# Altium PCB 智能家居-窗帘-控制板.PcbDoc
Units mm, origin at the board's own origin, x right, y up, seen from the top; angles counter-clockwise.
Board outline 68.87 x 67.29 mm, 2 copper layers (Top Layer, Bottom Layer); 36 components, 30 nets, 155 pads, 0 vias.
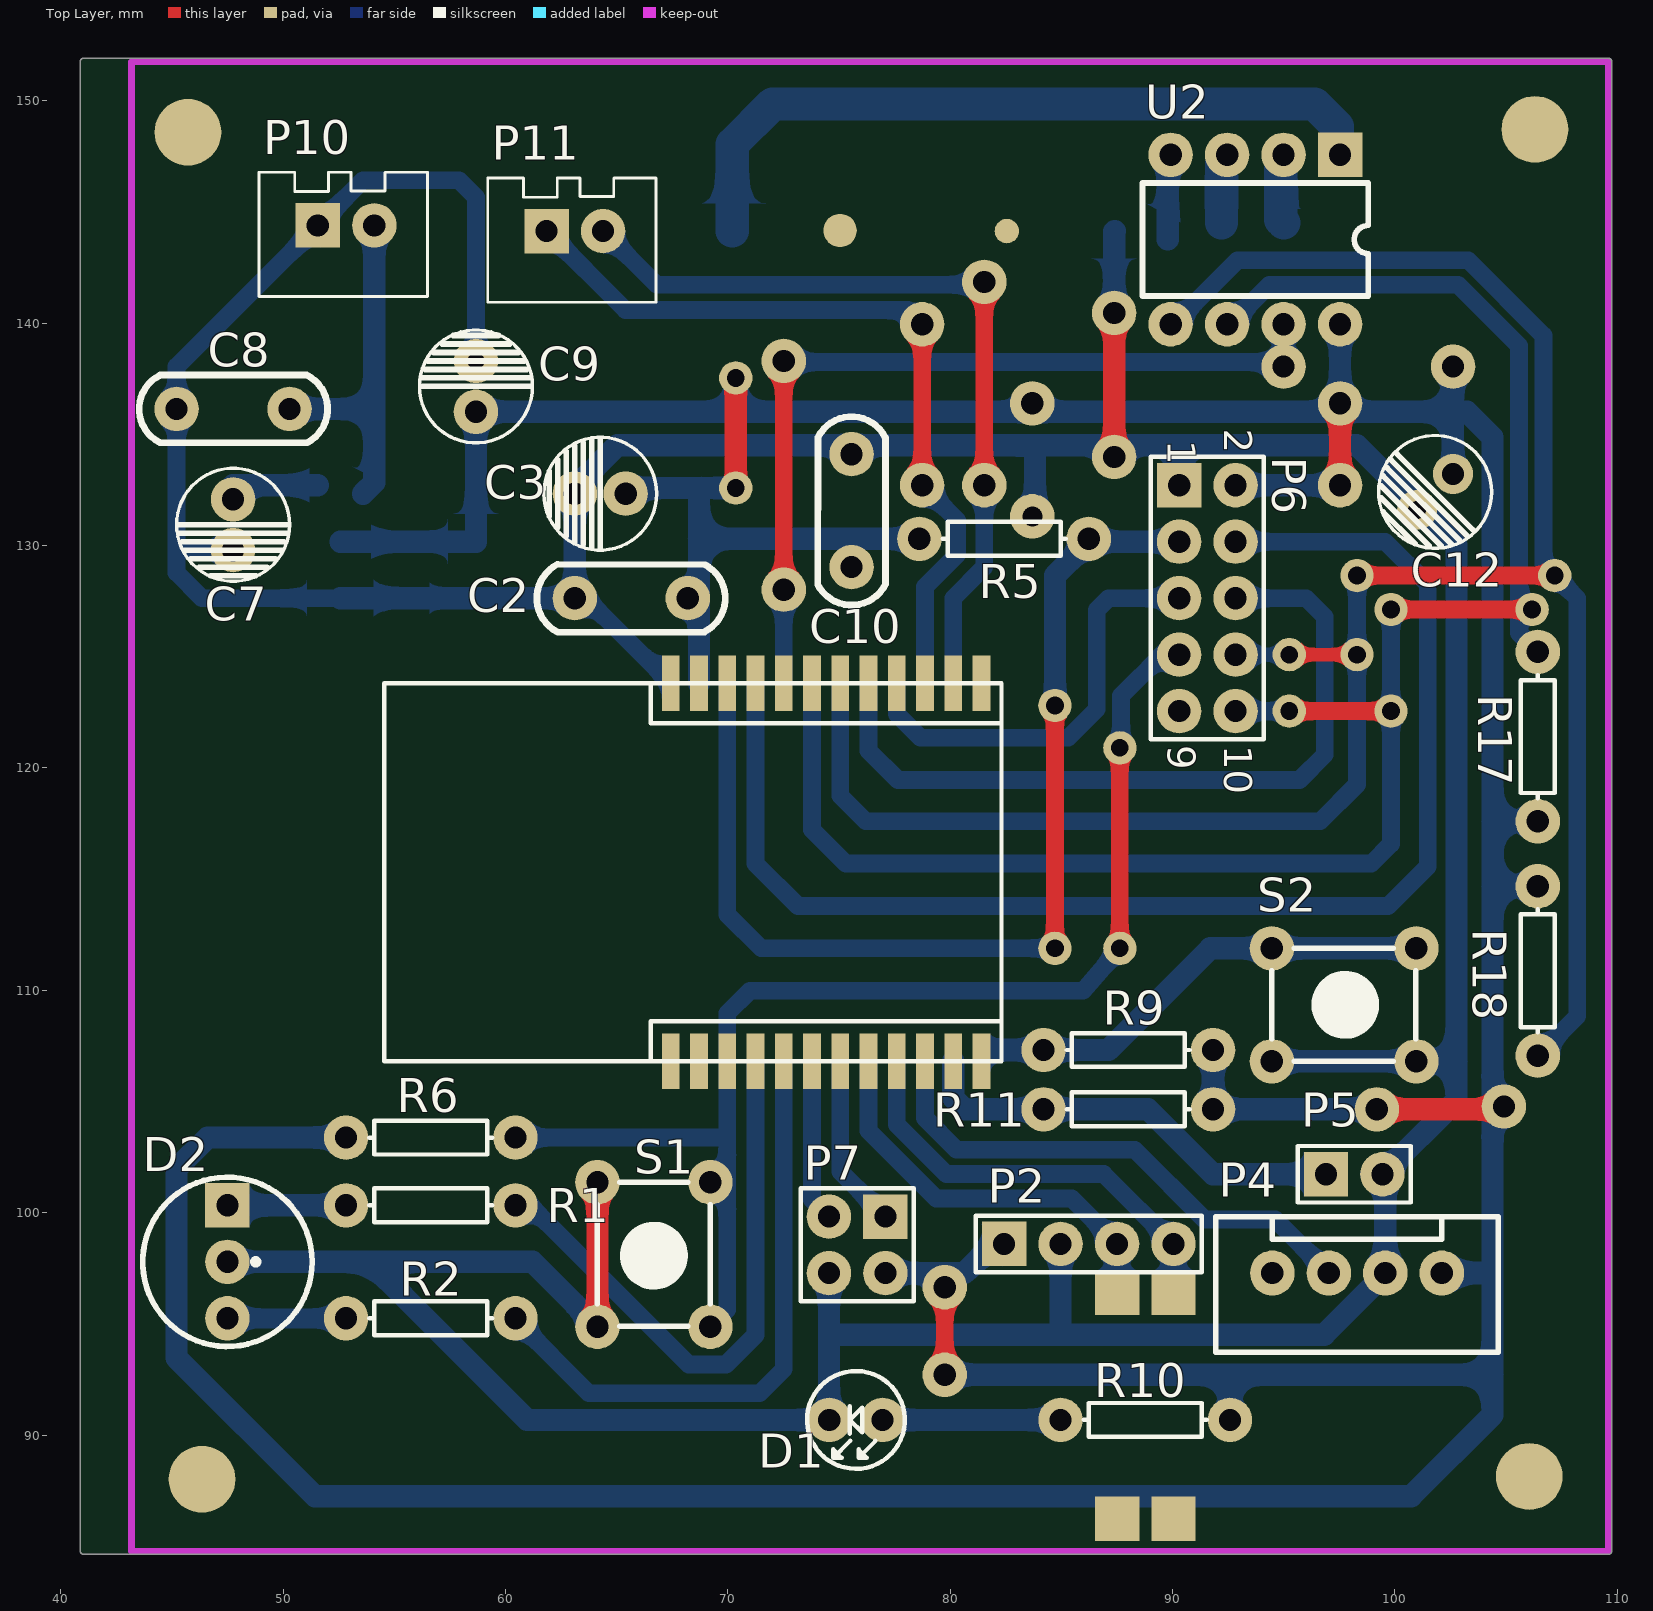
[diagram p0: Top Layer view]
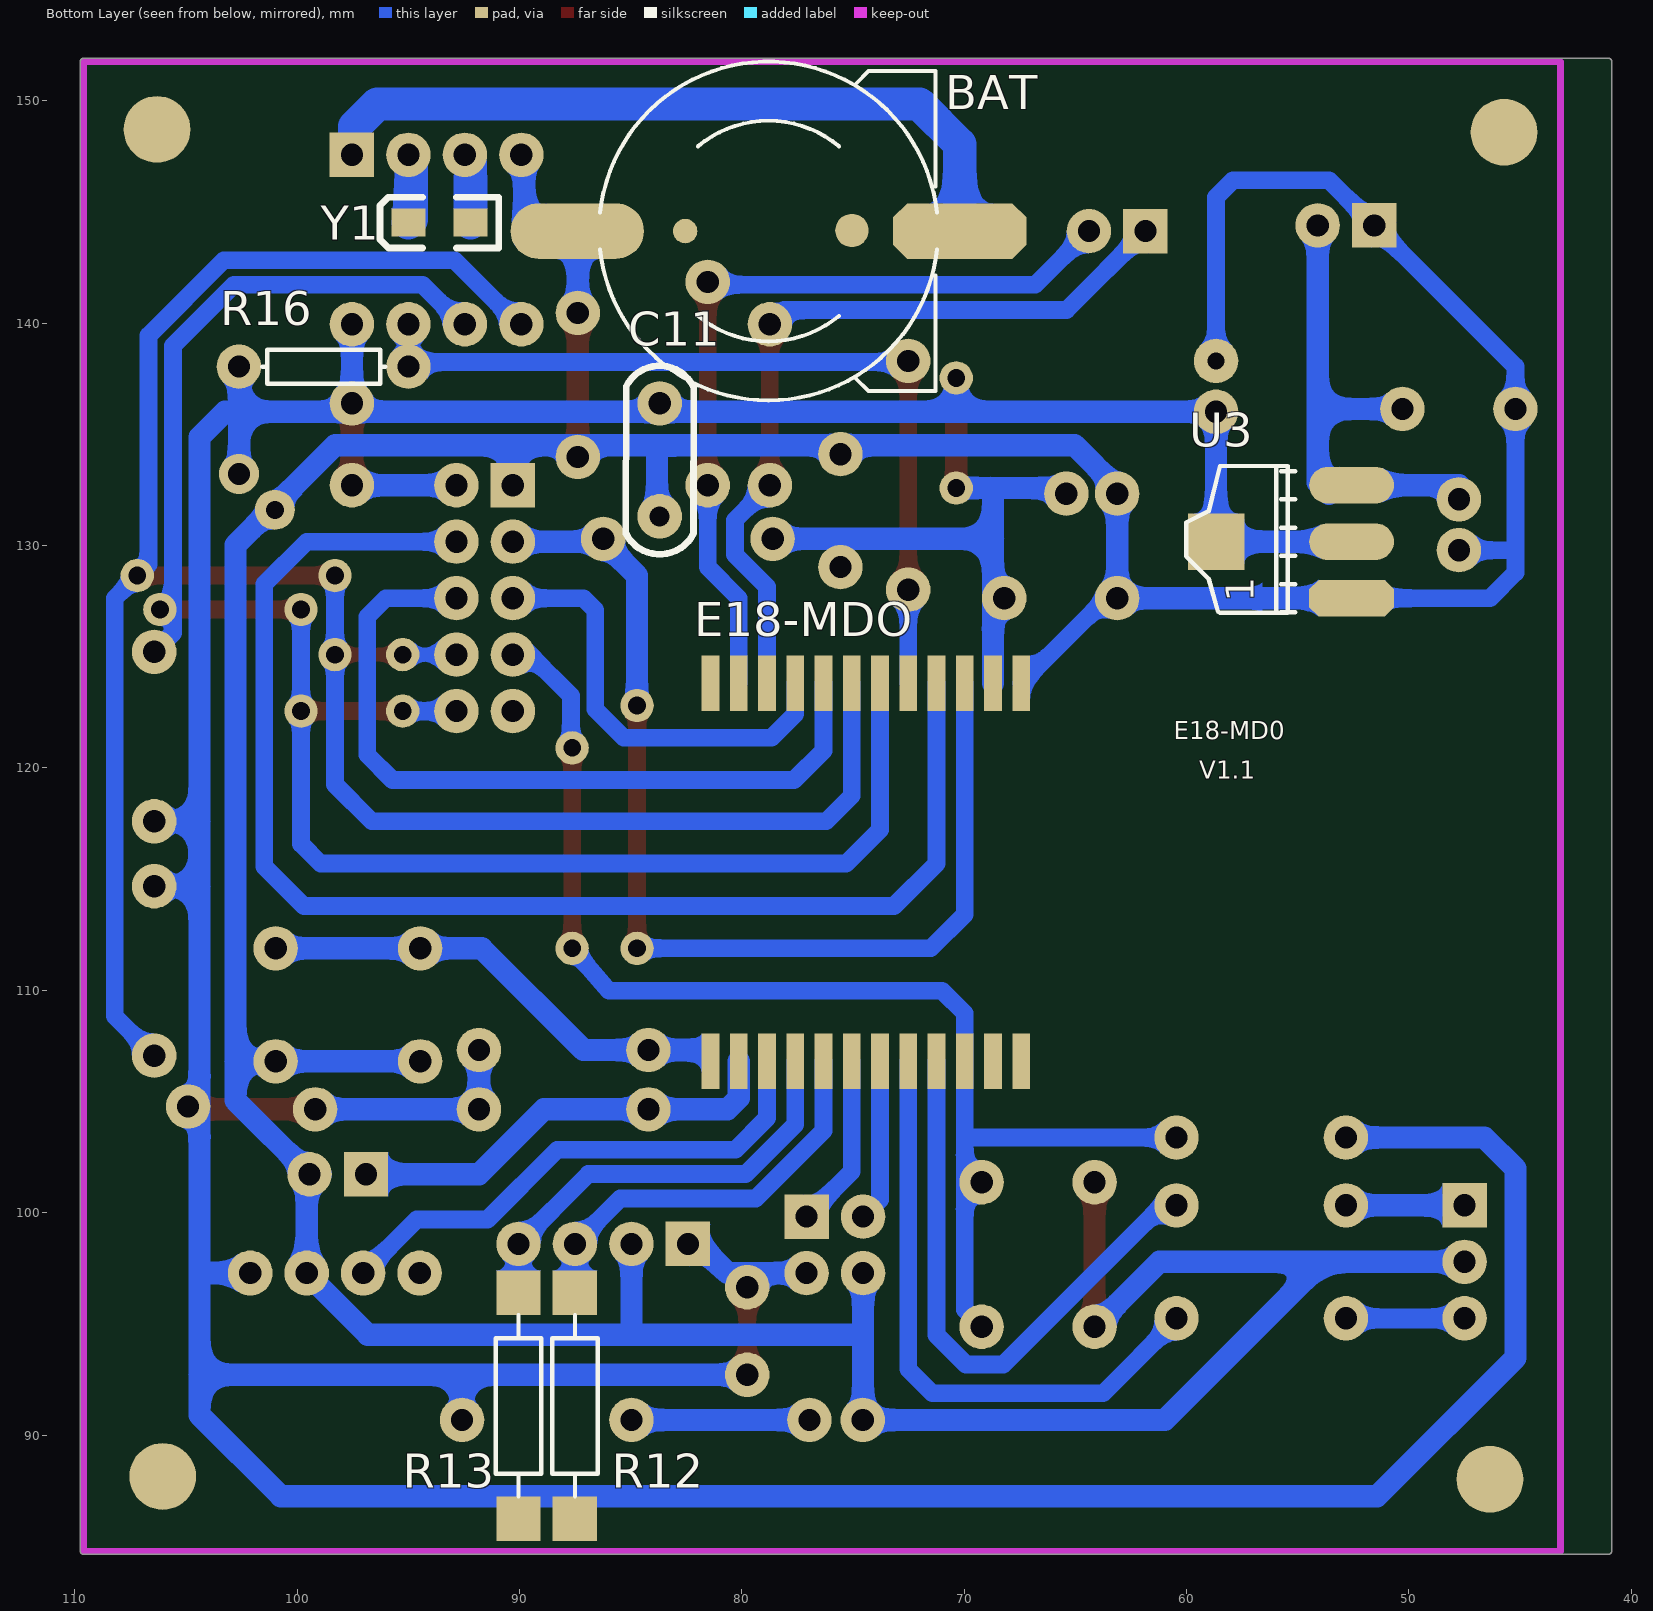
[diagram p1: Bottom Layer view, seen from below]

## Layer stack, top to bottom
Top Solder: solder mask 0.0102, Solder Resist, Dk 3.5
Top Layer: signal copper 0.0356
Dielectric 1: dielectric 0.32, FR-4, Dk 4.8
Bottom Layer: signal copper 0.0356
Bottom Solder: solder mask 0.0102, Solder Resist, Dk 3.5

## Board outline
41.029,84.63 cw(c41.029,84.78) 40.879,84.78 40.879,151.765 cw(c41.029,151.765) 41.029,151.915 109.601,151.915 cw(c109.601,151.765) 109.751,151.765 109.751,84.78 cw(c109.601,84.78) 109.601,84.63

## Design rules (kind name [scope] priority, off if disabled: settings)
Clearance [All] p1: gap=0.3
PolygonConnect [All] p1: connectstyle=Relief reliefconductorwidth=0.254 reliefentries=4 polygonreliefangle="90 Angle" airgapwidth=0.254
RoutingVias [All] p1: holewidth=1 width=2 viastyle="Through Hole" minholewidth=0.711 minwidth=1.27 maxholewidth=0.711 maxwidth=1.27
SolderMaskExpansion [All] p1: expansion=0.102
Width [All] p1: maxlimit=5 minlimit=0.5 preferedwidth=0.8 minimp=50.000000 maximp=50.000000 favimp=50.000000
30 further rules are at their usual default settings.

## Components (designator, comment, footprint, x,y, rotation, side; value= is the part's Value field where it differs from the comment)
BAT "BATT" BATM 78.802,144.145 r90 bottom
C2 "0.01uF" 0.1UF#1 65.659,127.635 r180 top
C3 "Cap Pol1" CD5#1 65.405,132.334 r270 top
C7 "Cap Pol1" CD5#1 47.752,132.08 r0 top
C8 "0.01uF" 0.1UF#1 47.752,136.144 r0 top
C9 "Cap Pol1" CD5#2 58.674,136.017 r180 top
C10 "0.01uF" 0.1UF#1 75.565,131.572 r270 top
C11 "0.01uF" 0.1UF#2 83.693,133.858 r270 bottom
C12 "Cap Pol1" CD5#3 102.616,133.223 r315 top
D1 "LED0" LED-3 76.962,90.678 r180 top
D2 "RG-LED-K" RG-LED 47.498,100.33 r270 top
E18-MDO "Zigbee" E18-MD0-1 81.407,122.907 r180 bottom
P2 "电机测速板" HDR1X4 82.423,98.595 r0 top
P4 "雨滴模块" DG1284 104.648,96.774 r180 top
P5 "光敏电阻" HDR1X2 96.901,101.727 r0 top
P6 "程序下载接口" HDR2X5 90.297,132.715 r270 top
P7 "调试接口" HDR2X2 77.089,99.822 r180 top
P10 "Header 2" TJC3-2A 51.562,144.399 r0 top
P11 "Header 2" TJC3-2A 61.849,144.145 r0 top
R1 "100" AXIAL-0.3 56.642,100.33 r0 top
R2 "100" AXIAL-0.3 56.642,95.25 r0 top
R5 "4.7K" AXIAL-0.3 82.423,130.302 r0 top
R6 "4.7K" AXIAL-0.3 56.642,103.378 r0 top
R9 "4.7K" AXIAL-0.3 88.011,107.315 r180 top
R10 "Res1" AXIAL-0.3 88.773,90.678 r180 top
R11 "4.7K" AXIAL-0.3 88.011,104.648 r0 top
R12 "4.7K" AXIAL-0.4 87.503,91.313 r270 bottom
R13 "4.7K" AXIAL-0.4 90.043,91.313 r270 bottom
R16 "10K" AXIAL-0.3 98.806,138.049 r0 bottom
R17 "10K" AXIAL-0.3 106.426,121.412 r270 top
R18 "10K" AXIAL-0.3 106.426,110.871 r90 top
S1 "SW-PB" KEY_M 69.215,101.369 r270 top
S2 "SW-PB" KEY_M 94.465,111.887 r0 top
U2 "DS1302" DIP-8N 97.536,147.574 r270 top
U3 "AMS1117-5" AMS1117 52.58,127.634 r90 bottom
Y1 "32KHz" 3216 92.202,144.526 r0 bottom

## Footprints (in the part's own frame and the unit in brackets; to place one, negate y for a bottom-side part, rotate by r counter-clockwise, add the part's x,y. Pads: shape width x height; smd on the part's side, far side on the other; paste and mask are expansions set on the pad)
0.1UF#1 [mm]
  round 2 hole 1: 1(-2.54,0) 2(2.54,0)
  silkscreen extent -4.22,-1.52 4.25,1.53
0.1UF#2 [mm]
  round 2 hole 1: 1(-2.54,0)
  round 2 hole 0.9: 2(2.54,0)
  silkscreen extent -4.22,-1.52 4.25,1.53
3216 [mil]
  rect 60x50 smd: 1(0,0) 2(110,0)
  silkscreen extent -50,-45 160,45
AMS1117 [mil]
  oct 65x150 smd: 1(0.03,-0.06)
  oval 65x150 smd: 2(100.03,-0.06) 3(200.03,-0.06)
  rect 100x100 smd: 4(100.03,239.94)
  silkscreen extent -26,100 234,293
AXIAL-0.3 [mm] "Axial Device, Thru-Hole; 2 Leads; 0.3 in Pin Spacing"
  round 2 hole 1: 1(-3.81,0) 2(3.81,0)
  silkscreen extent -2.77,-0.76 2.77,0.76
AXIAL-0.4 [mm] "Axial Device, Thru-Hole; 2 Leads; 0.4 in Pin Spacing"
  rect 2x2 all layers, no hole: 1(-5.08,0) 2(5.08,0)
  silkscreen extent -4.06,-1.02 4.06,1.02
BATM [mm]
  round 1.1 all layers, no hole: 0(0,3.748)
  round 1.5 all layers, no hole: 0(0.025,-3.752)
  oct 2.5x6 smd: 1(0,-8.602)
  oval 2.5x6 smd: 2(0,8.598)
  silkscreen extent -7.62,-7.58 7.62,7.57
CD5#1 [mm]
  round 2 hole 1: 1(0,0) 2(0,-2.286)
  silkscreen extent -2.54,-3.68 2.54,1.4
CD5#2 [mm]
  round 2 hole 1: 1(0,0)
  round 2 hole 0.762: 2(0,-2.286)
  silkscreen extent -2.54,-3.68 2.54,1.39
CD5#3 [mm]
  round 1.8 hole 1: 1(0,0)
  round 1.8 hole 0.8: 2(0,-2.286)
  silkscreen extent -2.54,-3.68 2.54,1.4
DG1284 [mm]
  oval 2x2.032 hole 1: 1(2.54,-0.508) 2(5.08,-0.508) 3(7.62,-0.508) 4(10.16,-0.508)
  silkscreen extent 0,-3.05 12.7,3.05
DIP-8N [mm]
  rect 2x2 hole 1: 1(0,0)
  round 2 hole 1: 2(0,-2.54) 3(0,-5.08) 4(0,-7.62) 5(7.62,-7.62) 6(7.62,-5.08) 7(7.62,-2.54) 8(7.62,0)
  silkscreen extent 1.27,-8.89 6.35,1.27
E18-MD0-1 [mm] "Connector; Header; 8 Position"
  rect 0.8x2.5 all layers, no hole: 1(13.97,0.9) 2(12.7,0.9) 3(11.43,0.9) 4(10.16,0.9) 5(8.89,0.9) 6(7.62,0.9) 7(6.35,0.9) 8(5.08,0.9) 9(3.81,0.9) 10(2.54,0.9) 11(1.27,0.9) 12(0,0.9) 13(0,-16.1) 14(1.27,-16.1) 15(2.54,-16.1) 16(3.81,-16.1) 17(5.08,-16.1) 18(6.35,-16.1) 19(7.62,-16.1) 20(8.89,-16.1) 21(10.16,-16.1) 22(11.43,-16.1) 23(12.7,-16.1) 24(13.97,-16.1)
  Top Layer lines w0.22: 0.14,-15.52 cw(c0.116,-15.496) 0.116,-15.53 0.11,-15.53
HDR1X2 [mm] "Connector; Header; 2 Position"
  rect 2x2 hole 1: 1(0,0)
  round 2 hole 1: 2(2.54,0)
  silkscreen extent -1.27,-1.27 3.81,1.27
HDR1X4 [mm]
  rect 2x2 hole 1: 1(0,0)
  round 2 hole 1: 2(2.54,0) 3(5.08,0) 4(7.62,0)
  silkscreen extent -1.27,-1.27 8.89,1.27
HDR2X2 [mm]
  rect 2x2 hole 1: 1(0,0)
  round 2 hole 1: 2(0,2.54) 3(2.54,0) 4(2.54,2.54)
  silkscreen extent -1.27,-1.27 3.81,3.81
HDR2X5 [mm] "Connector; Header; 5x2 Position"
  rect 2x2 hole 1: 1(0,0)
  round 2 hole 1: 2(0,2.54) 3(2.54,0) 4(2.54,2.54) 5(5.08,0) 6(5.08,2.54) 7(7.62,0) 8(7.62,2.54) 9(10.16,0) 10(10.16,2.54)
  silkscreen extent -1.27,-1.27 11.43,3.81
KEY_M [mm]
  round 2 hole 1: 1(0,0) 1(6.5,0) 2(0,-5.08) 2(6.5,-5.08)
  silkscreen extent 0,-5.08 6.48,0
LED-3 [mm]
  round 2 hole 1: 1(0,0) 2(2.4,0)
  silkscreen extent -1,-2.2 3.4,2.2
RG-LED [mm]
  rect 2x2 hole 1: 1(0,0)
  round 2 hole 1: 2(2.54,0) 3(5.08,0)
  silkscreen extent -1.27,-3.81 6.35,3.81
TJC3-2A [mm]
  rect 2x2 hole 1: 1(0,0)
  round 2 hole 1: 2(2.54,0)
  silkscreen extent -2.64,-3.2 4.93,2.39

## Part data
BAT: library part BAT
C2 C8 C10 C11: library part C
C3 C7 C9 C12: "Polarized Capacitor (Radial)"
D1: "Typical INFRARED GaAs LED"
E18-MDO: library part E18-MDO, "Zigbee模块"
P2 P4: library part "Header 4", "Header, 4-Pin"
P5: library part "Header 2", "Header, 2-Pin"
P6: library part "Header 5X2", "Header, 5-Pin, Dual row"
P7: library part "Header 2X2H", "Header, 2-Pin, Dual row, Right Angle"
P10 P11: "Header, 2-Pin"
R1 R2 R5 R6 R9 R11 R12 R13 R16 R17 R18: library part R
R10: "Resistor"
S1 S2: "Switch"
U3: library part AMS1117
Y1: library part XTAL, "Crystal Oscillator"

## Free pads (board coordinates)
  round 3 all layers, no hole: 7(45.72,148.59) 7(46.355,88.011) 7(106.045,88.138) 7(106.299,148.717)
  round 1.5 hole 0.8: 9(84.709,111.887) 9(84.709,122.809) 9(87.63,111.887) 9(87.63,120.904) 9(95.25,122.555) 9(95.25,125.095) 9(98.298,125.095) 9(98.298,128.651) 9(99.822,122.555) 9(99.822,127.127) 9(106.172,127.127) 9(107.188,128.651) 10(70.358,132.588) 10(70.358,137.541)
  round 2 hole 1: 10(72.517,128.016) 10(72.517,138.303) 10(78.74,132.715) 10(78.74,139.954) 10(81.534,132.715) 10(81.534,141.859) 10(87.376,133.985) 10(87.376,140.462) 10(97.536,132.715) 10(97.536,136.398) 11(79.756,92.71) 11(79.756,96.647) 11(99.187,104.648) 11(104.902,104.775)

## Nets (pads, with @x,y where several pads share a name; then routed paths per layer and width w, separated by ;. In a path a pad name is that pad's centre, name@x,y a point inside that pad or via, vN(x,y) a via of type N, cw(c..) or ccw(c..) an arc to the next point about the centre after c; other vN are vias at no path point)
AO: P4.4
BRIGHTNESS: E18-MDO.14 P5.1 R11.1 | length 19.8
  Bottom Layer w1: E18-MDO.14 80.137,105.156 80.645,104.648 R11.1 88.9,104.648 91.821,101.727 P5.1
DBG_CSN: E18-MDO.9 P6.5 | length 19.7
  Bottom Layer w0.8: E18-MDO.9 77.597,122.428 78.666,121.359 85.31,121.359 86.587,122.636 86.587,127.1 87.122,127.635 P6.5
DBG_DC: E18-MDO.3 P6.3 pad.9@84.709,111.887 pad.9@84.709,122.809 R5.2 | length 48.7
  Top Layer w0.8: pad.9@84.709,111.887 pad.9@84.709,122.809
  Bottom Layer w0.8: E18-MDO.3 69.977,113.411 71.501,111.887 pad.9@84.709,111.887
  Bottom Layer w1: pad.9@84.709,122.809 84.709,128.651 86.233,130.175 P6.3
DBG_DIO: E18-MDO.4 P6.4 | length 62
  Bottom Layer w0.8: E18-MDO.4 71.247,115.697 73.152,113.792 99.695,113.792 101.473,115.57 101.473,128.27 99.568,130.175 P6.4
DBG_MISO: E18-MDO.6 P6.10 pad.9@95.25,122.555 pad.9@99.822,122.555 pad.9@99.822,127.127 pad.9@106.172,127.127 R17.1 U2.6 | length 86.8
  Top Layer w0.8: pad.9@95.25,122.555 pad.9@99.822,122.555 ; pad.9@99.822,127.127 pad.9@106.172,127.127
  Bottom Layer w0.8: E18-MDO.6 73.787,117.221 75.311,115.697 98.933,115.697 99.822,116.586 99.822,122.555 pad.9@99.822,127.127 ; U2.6@92.329,139.7 94.361,141.732 102.838,141.732 105.584,138.986 105.584,126.064 R17.1 ; P6.10 pad.9@95.25,122.555
DBG_MOSI: E18-MDO.7 P6.8 pad.9@95.25,125.095 pad.9@98.298,125.095 pad.9@98.298,128.651 pad.9@107.188,128.651 R18.1 U2.5 | length 106.8
  Top Layer w0.6: pad.9@95.25,125.095 pad.9@98.298,125.095
  Top Layer w0.8: pad.9@98.298,128.651 pad.9@107.188,128.651
  Bottom Layer w0.6: P6.8 pad.9@95.25,125.095
  Bottom Layer w0.8: E18-MDO.7 75.057,118.745 76.2,117.602 96.647,117.602 98.298,119.253 98.298,125.095 pad.9@98.298,128.651 ; U2.5@89.789,139.7 92.921,142.832 103.294,142.832 106.684,139.442 106.684,129.155 107.188,128.651 108.204,127.635 108.204,108.839 R18.1 ; R18.1@106.426,106.68 R18.1@106.617,106.87
DBG_SCK: E18-MDO.8 P6.6 | length 35.1
  Bottom Layer w0.8: E18-MDO.8 76.327,120.777 77.65,119.454 95.705,119.454 96.848,120.597 96.848,126.799 96.012,127.635 P6.6
DO: E18-MDO.15 P4.3 | length 23.6
  Bottom Layer w0.8: E18-MDO.15 78.867,104.252 80.286,102.833 88.302,102.833 91.44,99.695 94.615,99.695 P4.3
GND: BAT.2 C2.2 C3.2 C7.2 C8.1 C9.2 C10.1 C11.2 C12.2 D1.2 D2.2 E18-MDO.1 P2.2 P4.2 P5.2 P6.1 P7.4 P10.1 pad.10@87.376,133.985 pad.10@87.376,140.462 S1.2 S2.2 U2.4 U3.1 | length 254.7
  Top Layer w1: S1.2@64.135,94.869 S1.2@64.135,101.369 ; pad.10@87.376,133.985 pad.10@87.376,140.462
  Bottom Layer w0.8: C7.2 45.339,129.794 45.212,129.667 ; U3.1 46.355,127.635 45.212,128.778 45.212,129.667 ; C9.2 58.674,145.669 57.912,146.431 53.594,146.431 P10.1 45.212,138.049 C8.1 45.212,129.667 ; C2.2@63.609,127.635 E18-MDO.1
  Bottom Layer w1: D2.2 53.87,97.79 ; U3.1 C2.2 ; C2.2@63.609,127.635 C2.2 ; S1.2@64.135,94.869 61.214,97.79 53.87,97.79 ; P7.4 74.549,94.488 ; D1.2 D1.2@74.549,90.678 ; C11.2@83.82,131.064 83.82,134.261 83.566,134.515 ; P2.2 84.963,94.637 85.09,94.51 ; pad.10@87.376,140.462 87.376,144.121 BAT.2 ; BAT.2@89.789,143.764 U2.4@89.789,147.32 ; P6.1 90.297,134.515 ; S2.2@94.465,106.807 100.965,106.807 102.765,106.807 ; P5.2@98.933,101.727 99.568,101.092 P4.2 99.568,97.26 96.818,94.51 85.09,94.51 ; P5.2 102.765,105.051 102.765,106.807 ; 53.87,97.79 60.982,90.678 D1.2@74.549,90.678 ; C2.2 C3.2 63.119,132.594 65.04,134.515 83.566,134.515 ; D1.2@74.549,90.678 74.549,94.488 ; 74.549,94.488 74.571,94.51 85.09,94.51 ; 83.566,134.515 90.297,134.515 ; 90.297,134.515 98.282,134.515 102.765,130.032 102.765,106.807
KEY1: E18-MDO.13 R9.2 S2.1 | length 21.3
  Bottom Layer w1: E18-MDO.13@81.534,107.315 R9.2 87.122,107.315 91.694,111.887 94.465,111.887 S2.1@100.965,111.887
KEY2: E18-MDO.12
KM1: E18-MDO.11 P11.2 pad.10@81.534,132.715 pad.10@81.534,141.859 | length 36.6
  Top Layer w0.8: pad.10@81.534,132.715 pad.10@81.534,141.859
  Bottom Layer w0.8: P11.2 66.802,141.732 pad.10@81.407,141.732 ; E18-MDO.11 80.137,127.635 81.534,129.032 pad.10@81.534,132.715
KM2: E18-MDO.10 P11.1 pad.10@78.74,132.715 pad.10@78.74,139.954 | length 36
  Top Layer w0.8: pad.10@78.74,132.715 pad.10@78.74,139.954
  Bottom Layer w0.8: P11.1 65.405,140.589 78.105,140.589 pad.10@78.74,139.954 ; pad.10@78.74,132.715 80.313,131.142 80.313,129.598 78.867,128.152 E18-MDO.10
LED1: E18-MDO.21 R1.2 | length 26.6
  Bottom Layer w0.8: R1.2 61.078,100.33 68.239,93.169 69.919,93.169 71.247,94.497 E18-MDO.21
LED2: E18-MDO.20 R2.2 | length 27.8
  Bottom Layer w0.8: R2.2 60.452,95.178 63.752,91.878 71.431,91.878 72.517,92.964 E18-MDO.20
NetBAT_1: BAT.1 U2.1 | length 33.8
  Bottom Layer w1.5: BAT.1 70.2,148.051 72.009,149.86 96.393,149.86 97.409,148.844 U2.1@97.409,147.32
NetD1_1: D1.1 R10.2 | length 8
  Bottom Layer w1: D1.1 R10.2
NetD2_1: D2.1 R1.1 | length 5.3
  Bottom Layer w1: D2.1 R1.1
NetD2_3: D2.3 R2.1 | length 5.3
  Bottom Layer w0.9: D2.3 R2.1
NetU2_2: U2.2 Y1.2 | length 2.8
  Bottom Layer w1.5: U2.2@94.869,147.32 94.869,144.653 Y1.2
NetU2_3: U2.3 Y1.1 | length 2.8
  Bottom Layer w1.5: Y1.1 92.202,147.193 U2.3@92.329,147.32
P0.2: E18-MDO.19 P7.3 | length 7.3
  Bottom Layer w0.8: E18-MDO.19 73.787,100.584 P7.3
P0.3: E18-MDO.18 P7.1 | length 7.8
  Bottom Layer w0.8: E18-MDO.18 75.057,101.854 P7.1
P0.4: E18-MDO.17 P2.3 R12.1 | length 18.6
  Bottom Layer w0.8: E18-MDO.17 76.327,103.681 79.375,100.633 85.465,100.633 P2.3
  Bottom Layer w1: R12.1 P2.3
P0.5: E18-MDO.16 P2.4 R13.1 | length 19.7
  Bottom Layer w0.8: E18-MDO.16 77.597,103.967 79.831,101.733 86.905,101.733 P2.4
  Bottom Layer w1: R13.1 P2.4
P2.0: E18-MDO.5 pad.10@72.517,128.016 pad.10@72.517,138.303 R16.1 U2.7 | length 38.8
  Top Layer w0.8: pad.10@72.517,128.016 pad.10@72.517,138.303
  Bottom Layer w0.8: E18-MDO.5 pad.10@72.517,128.016 ; pad.10@72.517,138.303 72.517,138.254 94.791,138.254 R16.1@94.869,138.176 ; R16.1 U2.7
RST: E18-MDO.22 P6.7 pad.9@87.63,111.887 pad.9@87.63,120.904 R6.2 S1.1 | length 57.7
  Top Layer w0.8: pad.9@87.63,111.887 pad.9@87.63,120.904
  Bottom Layer w0.8: R6.2 69.827,103.378 69.977,103.528 ; S1.1@69.215,94.869 69.977,95.631 69.977,103.528 ; pad.9@87.63,111.887 85.979,109.982 70.993,109.982 69.977,108.966 E18-MDO.22 69.977,103.528 ; pad.9@87.63,120.904 87.687,120.961 87.687,123.247 89.535,125.095 P6.7
VCC-5: C2.1 C3.1 C9.1 C10.2 C11.1 C12.1 E18-MDO.2 P2.1 P4.1 P6.2 P7.2 pad.10@70.358,132.588 pad.10@70.358,137.541 pad.10@97.536,132.715 pad.10@97.536,136.398 pad.11 R5.1 R6.1 R9.1 R10.1 R11.2 R12.2 R13.2 R16.2 R17.2 R18.2 U2.8 U3.2 U3.4 | length 290.1
  Top Layer w0.8: pad.11@79.756,92.71 pad.11@79.756,96.647
  Top Layer w1: pad.10@70.358,132.588 pad.10@70.358,137.541 ; pad.10@97.536,132.715 pad.10@97.536,136.398 ; pad.11@99.187,104.648 104.775,104.648 pad.11@104.902,104.775
  Bottom Layer w0.8: pad.11@79.756,96.647 pad.11@80.01,96.647 ; P2.1@81.958,98.595 P2.1
  Bottom Layer w1: U3.2 U3.4 58.674,135.868 58.823,136.017 70.358,136.017 ; R6.1 46.609,103.378 45.212,101.981 45.212,93.472 51.435,87.249 100.731,87.249 104.384,90.902 104.384,92.71 ; C3.1 65.659,132.588 68.834,132.588 ; E18-MDO.2 68.707,130.302 ; pad.10@70.358,132.588 68.834,132.588 ; pad.10@70.358,137.541 70.358,136.017 ; C10.2@75.438,129.032 75.438,130.175 75.565,130.302 ; P7.2 80.645,97.282 81.858,98.495 P2.1@82.423,98.495 ; R5.1 75.565,130.302 ; pad.11@79.756,92.71 92.583,92.71 ; R9.1 R11.2 pad.11@99.187,104.648 ; R10.1 92.583,92.71 ; P6.2 pad.10@97.536,132.715 ; U2.8@97.536,139.446 97.536,136.398 pad.10@97.155,136.017 ; P4.1 104.257,97.282 104.384,97.155 ; C12.1@102.362,133.477 102.616,133.731 102.616,136.017 ; R16.2 102.616,136.017 ; pad.11@104.902,104.775 pad.11@104.384,104.775 ; R18.2 104.384,114.681 ; R17.2 104.384,117.602 ; 68.707,130.302 75.565,130.302 ; 68.707,130.302 68.707,132.461 68.834,132.588 ; 70.358,136.017 pad.10@97.155,136.017 ; 92.583,92.71 104.384,92.71 ; pad.10@97.155,136.017 102.616,136.017 ; 102.616,136.017 103.241,136.017 104.384,134.874 104.384,117.602 ; 104.384,92.71 104.384,97.155 ; 104.384,97.155 pad.11@104.384,104.775 ; pad.11@104.384,104.775 104.384,114.681 ; 104.384,114.681 104.384,117.602
VCC-12: C7.1 C8.2 P10.2 U3.3 | length 19.9
  Bottom Layer w1: C7.1@47.752,132.715 U3.3@51.562,132.715 ; C8.2 54.102,136.144 ; U3.3@53.594,132.334 54.102,132.842 54.102,136.144 ; P10.2 54.102,136.144
pads on no net: BAT.0 E18-MDO.23 E18-MDO.24 P6.9

## Keep-outs
Keep-Out Layer:
  lines w0.3: 43.18,84.78 43.18,151.765 109.601,151.765 109.601,84.78 43.18,84.78

## Silkscreen, mask and mechanical layers (free items; w line width, h text height)
Drill Drawing:
  text ".LEGEND" at 120.118,81.153 h1.52
  text "Drill Drawing." at 120.88,78.74 h1.52

## Dimensions
43.18,84.78 to 43.18,151.765 on Mechanical 1
43.18,84.78 to 109.601,84.78 on Mechanical 1

## Text inside footprints (layer, text, board x,y; h text height)
E18-MDO: Bottom Overlay "E18-MD0" at 60.567,121.287 h0.8; Bottom Overlay "V1.1" at 59.437,119.517 h0.8
P6: Top Overlay "2" at 92.329,135.255 h1.27 r270; Top Overlay "1" at 89.789,134.747 h1.27 r270; Top Overlay "9" at 89.789,121.031 h1.27 r270; Top Overlay "10" at 92.329,121.031 h1.27 r270
U3: Bottom Overlay "1" at 56.972,127.483 h1.27 r270